# EAGLE board GiGa_keyboard (EAGLE 7.1.0)
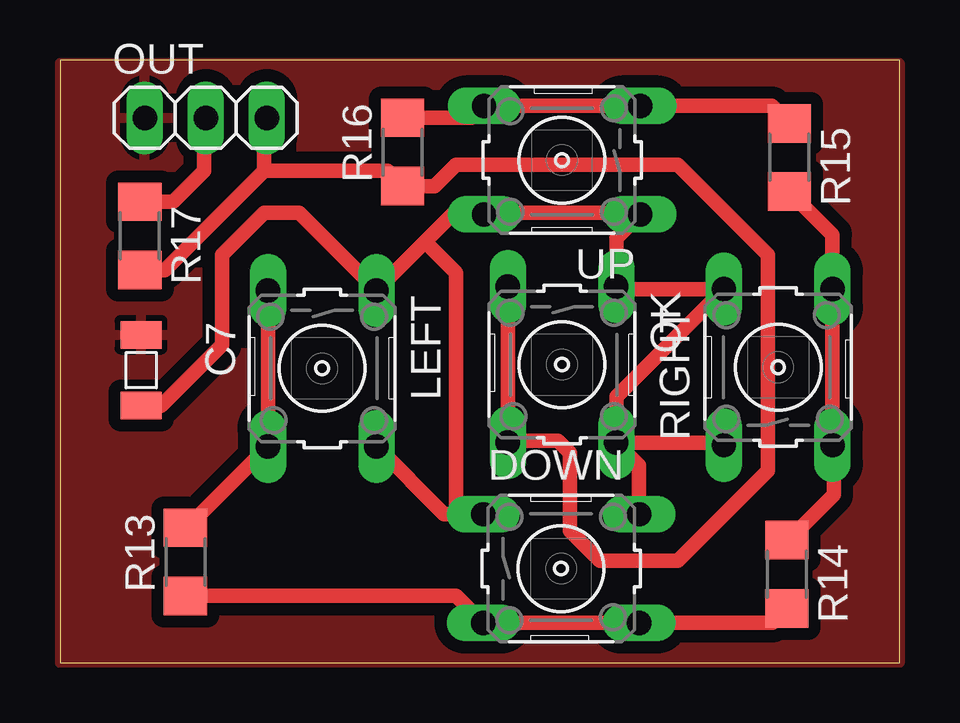
[diagram p0: board, top side]

Size 35 x 25.12 mm. Coordinates in mm from the lower left corner, seen from the top.
Outline: 0,0 35,0 35,25.12 0,25.12 0,0
Copper layers (1*16): Top 0.035mm / dielectric 1.5mm / Bottom 0.035mm
Design rules "default *": minimum track width 10mil, minimum drill 24mil, track to track 20mil, track to pad 20mil, pad to pad 20mil, via to via 20mil, smd to smd 10mil, copper to edge 0mil, drill to drill 8mil, minimum pad ring 10mil, minimum via ring 8mil, stop-mask expansion 4mil, vias tented up to drill 0mil, thermal gap 10mil

## Footprints (pad centres in the part's own frame; a part is rotated, then mirrored left to right if it is on the bottom)
1206 = smd 1.143 x 1.702: 1 -1.473,0; 2 1.473,0
B3F-10XX = drill 1.016 long: 1 -3.251,2.261; 2 3.251,2.261; 3 -3.251,-2.261; 4 3.251,-2.261
1X03 = drill 1.016 long: 1 -2.54,0; 2 0,0; 3 2.54,0
R1206 = smd 1.6 x 1.803: 1 -1.422,0; 2 1.422,0

## Placement (x,y rotation side)
C7  100nF  [1206]  3.38,12.19 270 top
DOWN  [B3F-10XX]  20.89,3.93 0 top
LEFT  [B3F-10XX]  10.93,12.27 270 top
OK  [B3F-10XX]  20.93,12.43 270 top
OUT  [1X03]  6.08,22.71 0 top
R13  3k3  [R1206]  5.23,4.21 90 top
R14  1k  [R1206]  30.3,3.69 270 top
R15  620  [R1206]  30.41,21.06 270 top
R16  330  [R1206]  14.28,21.29 90 top
R17  10k  [R1206]  3.33,17.79 270 top
RIGHT  [B3F-10XX]  29.94,12.32 90 top
UP  [B3F-10XX]  20.93,20.95 180 top

## Library data of the parts
C7 = capsmd
DOWN LEFT OK RIGHT UP = switch-omron; MPN: B3F-1000; OC_FARNELL: 176432; OC_NEWARK: 36M3542
OUT = pinhead
R13-R17 = rcl

## Nets
+5V: OUT.2 R17.1
ANALOG: OK.3 OK.4 OUT.3 R16.1 R17.2
GND: C7.1 OUT.1
N$15: C7.2 DOWN.1 DOWN.2 LEFT.1 LEFT.2 OK.1 OK.2 RIGHT.1 RIGHT.2 UP.1 UP.2
N$31: LEFT.3 LEFT.4 R13.2
N$36: DOWN.3 DOWN.4 R13.1 R14.2
N$37: R14.1 R15.2 RIGHT.3 RIGHT.4
N$38: R15.1 R16.2 UP.3 UP.4

## Tracks (layer width: path | path; a pad name or v marks a point on that pad's centre or on a via)
+5V
  Top 0.61: R17.1 4.71,19.21 6,20.5 6,22.63 OUT.2
ANALOG
  Top 0.61: R17.2 4.37,16.37 8.5,20.5 | 8.5,20.5 8.5,22.59 OUT.3 | 8.5,20.5 13.65,20.5 R16.1 15.62,19.87 16.5,20.75 25.75,20.75 29.5,17 29.5,8 25.75,4.25 22.5,4.25 21.25,5.5 21.25,8.75 20.75,9.25 18.74,9.25 OK.4 OK.3
GND
  pour Top: 0,25 35,25 35,0 0,0
N$15
  Top 0.61: DOWN.2 24.14,8.23 OK.2 | OK.2 27.57,9.18 RIGHT.1 | OK.2 23.19,11.08 RIGHT.2 23.3,15.57 OK.1 23.19,17.7 | 23.19,17.7 UP.1 | 23.19,17.7 24,18.75 17.68,18.75 UP.2 16.36,18.69 15.21,17.54 | 15.21,17.54 LEFT.1 9.96,18.75 8.5,18.75 6.75,17 6.75,13.25 4.22,10.72 C7.2 | LEFT.2 16.02,6.19 DOWN.1 16.5,6.19 16.5,16.25 15.21,17.54
N$31
  Top 0.61: R13.2 5.28,5.63 LEFT.4 LEFT.3
N$36
  Top 0.61: R13.1 16.52,2.79 DOWN.3 DOWN.4 29.7,1.67 R14.2
N$37
  Top 0.61: R14.1 30.36,5.11 32.25,7 32.25,9.02 RIGHT.3 RIGHT.4 32.2,17.85 R15.2
N$38
  Top 0.61: R16.2 17.18,22.71 UP.4 UP.3 29.68,23.21 R15.1